# EAGLE board untitled (EAGLE 9.6.2), part 1 of 3
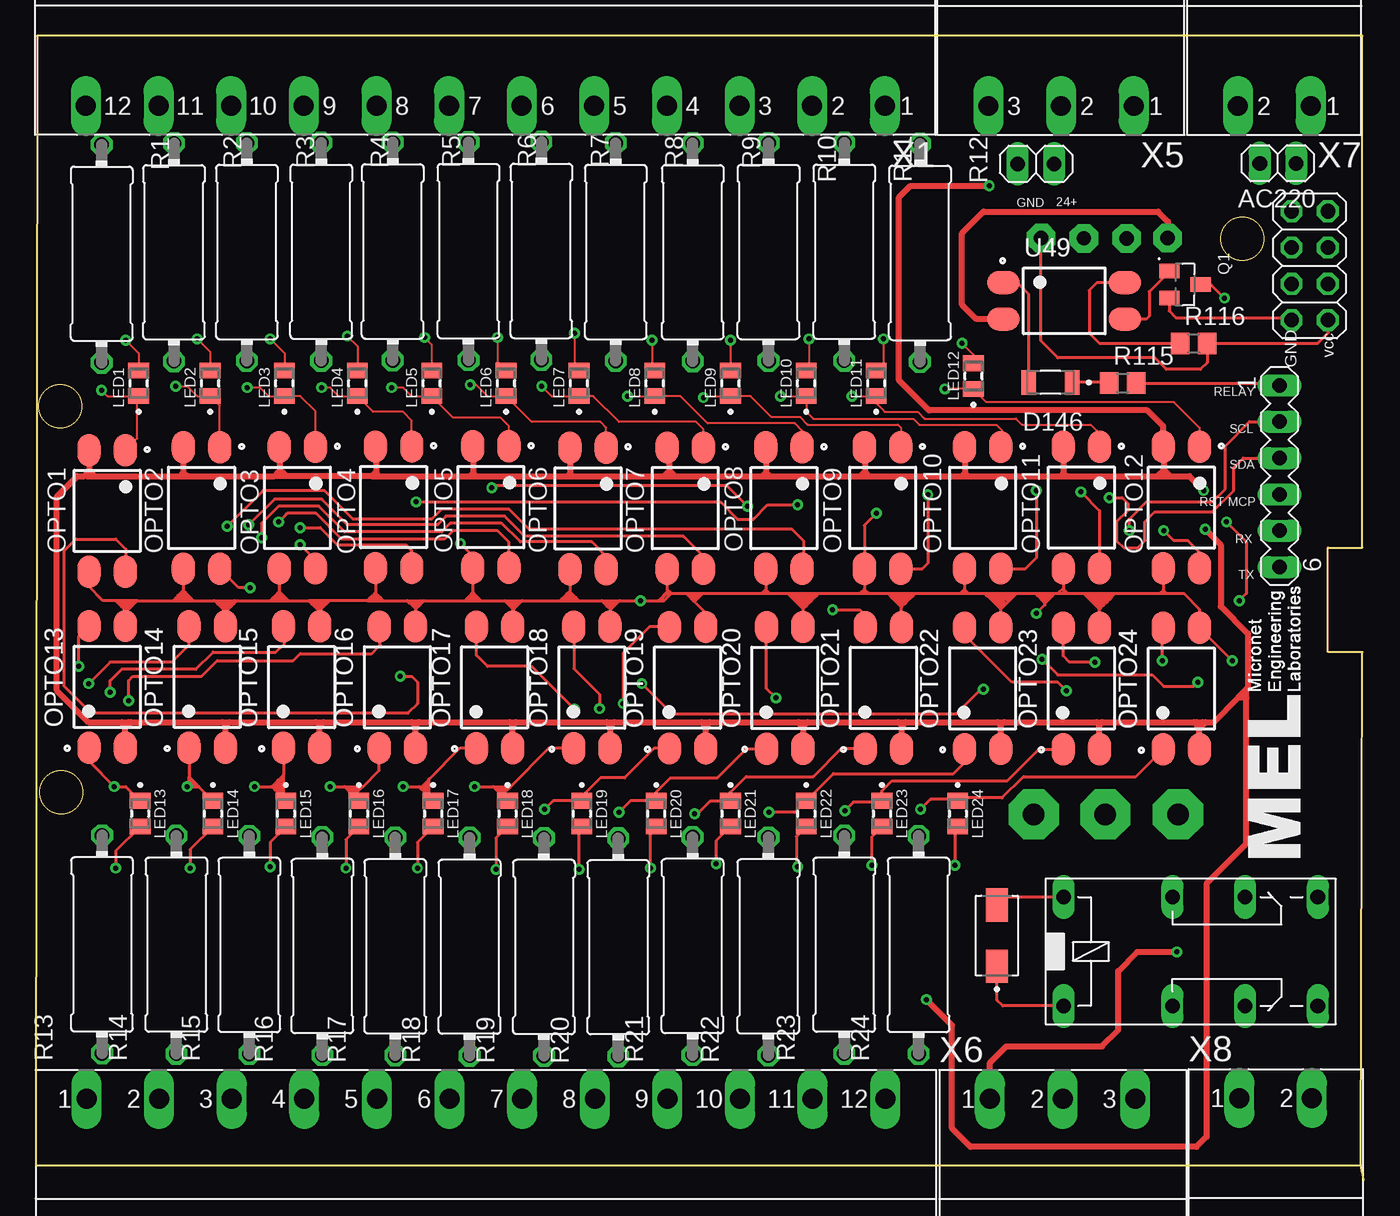
[diagram p0: board, top side]
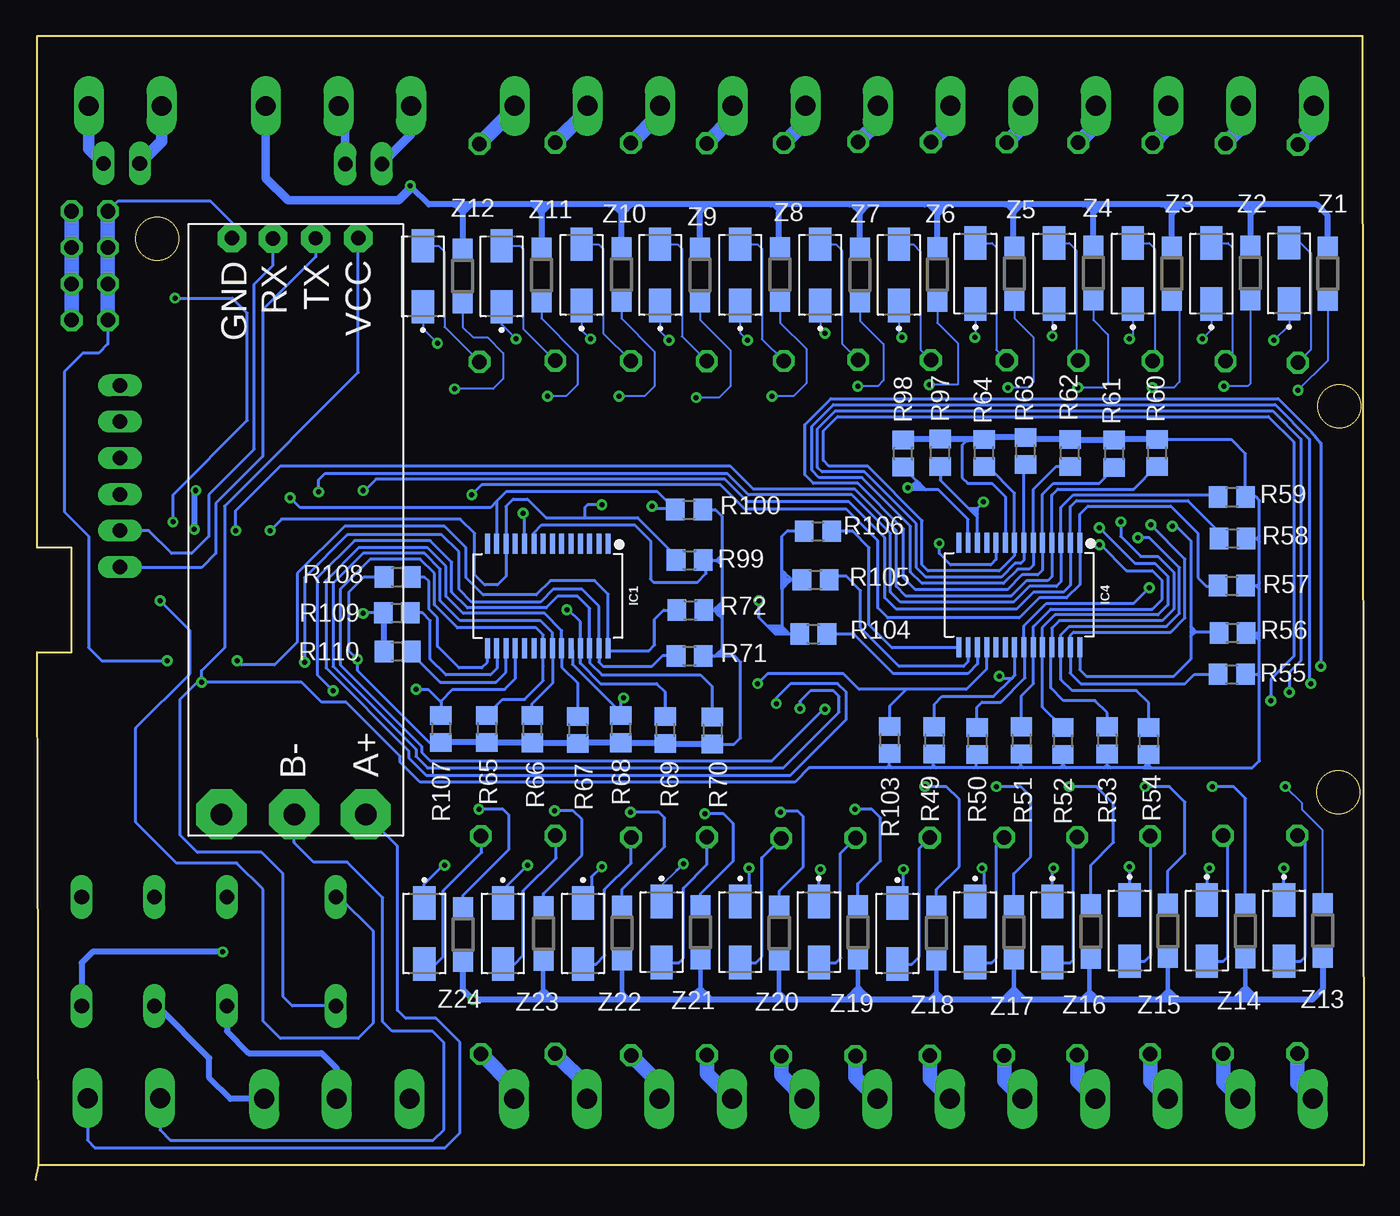
[diagram p1: board, bottom side, seen from below]

Size 92.9 x 80 mm. Coordinates in mm from the lower left corner, seen from the top.
Outline: 92.7,1 0,1 0.1,80 92.8,80 92.8,44.2 90.4,44.2 90.4,36.9 92.8,36.9 92.7,1
Outline: 92.9,0 92.7,1
Outline: circle at 84.4,65.8 radius 1.5
Outline: circle at 1.7,54.1 radius 1.5
Outline: circle at 1.8,27.1 radius 1.5
Copper layers (1*16): Top 0.035mm / dielectric 1.5mm / Bottom 0.035mm
Design rules "default": minimum track width 6mil, minimum drill 0.35mm, track to track 6mil, track to pad 6mil, pad to pad 6mil, via to via 6mil, smd to smd 6mil, copper to edge 40mil, drill to drill 6mil, minimum pad ring 10mil, minimum via ring 8mil, stop-mask expansion 4mil, vias tented up to drill 0mil, thermal gap 10mil
Net classes: 0 default: drill 0.3 mm, clearance 0.2 mm

## Footprints (pad centres in the part's own frame; a part is rotated, then mirrored left to right if it is on the bottom)
1X02 = drill 1.016 long: 1 -1.27,0; 2 1.27,0
DIOM5226X240N = smd 2.33 x 1.55: A 2.135,0; C -2.135,0
LEDC3216X120N = smd 1.01 x 1.73: + -1.51,0; - 1.51,0
SSOP28DB = smd 0.348 x 1.397: 1 -4.225,-3.656; 2 -3.575,-3.656; 3 -2.925,-3.656; 4 -2.275,-3.656; 5 -1.625,-3.656; 6 -0.975,-3.656; 7 -0.325,-3.656; 8 0.325,-3.656; 9 0.975,-3.656; 10 1.625,-3.656; 11 2.275,-3.656; 12 2.925,-3.656; 13 3.575,-3.656; 14 4.225,-3.656; 15 4.225,3.656; 16 3.575,3.656; 17 2.925,3.656; 18 2.275,3.656; 19 1.625,3.656; 20 0.975,3.656; 21 0.325,3.656; 22 -0.325,3.656; 23 -0.975,3.656; 24 -1.625,3.656; 25 -2.275,3.656; 26 -2.925,3.656; 27 -3.575,3.656; 28 -4.225,3.656
2X04 = drill 1.016 octagon: 1 -3.81,-1.27; 2 -3.81,1.27; 3 -1.27,-1.27; 4 -1.27,1.27; 5 1.27,-1.27; 6 1.27,1.27; 7 3.81,-1.27; 8 3.81,1.27
351 = drill 1.016 long: 1 -3.81,-3.81; 16 -3.81,3.81; O1 8.89,-3.81; O2 8.89,3.81; P1 3.81,-3.81; P2 3.81,3.81; S1 13.97,-3.81; S2 13.97,3.81
LEDC2012X120N = smd 1.1 x 1.45: A 0.9,0; C -0.9,0
SOT254P975X400-4N = smd 2.25 x 1.6: 1 -4.25,1.27; 2 -4.25,-1.27; 3 4.25,-1.27; 4 4.25,1.27
SOT95P240X120-3N = smd 1 x 1.4: 1 -0.95,-1.1; 2 0.95,-1.1; 3 0,1.1
0414/15 = drill 1.016 octagon: 1 -7.62,0; 2 7.62,0
R0805 = smd 1.3 x 1.5: 1 -0.95,0; 2 0.95,0
MA06-1 = drill 1.016 long: 1 -6.35,0; 2 -3.81,0; 3 -1.27,0; 4 1.27,0; 5 3.81,0; 6 6.35,0
TTL-RS485 = drill 1.5 pad 3.5 octagon: A -19.7,-6; B -19.7,-1; P$7 -19.7,4.1 | drill 1 pad 2 octagon: GND 20.6,3.37; RX 20.581,0.505; TX 20.583,-2.493; VCC 20.6,-5.47
MSTBA12 = drill 1.397 long: 1 -27.94,5.08; 2 -22.86,5.08; 3 -17.78,5.08; 4 -12.7,5.08; 5 -7.62,5.08; 6 -2.54,5.08; 7 2.54,5.08; 8 7.62,5.08; 9 12.7,5.08; 10 17.78,5.08; 11 22.86,5.08; 12 27.94,5.08
MSTBA3 = drill 1.397 long: 1 -5.08,5.08; 2 0,5.08; 3 5.08,5.08
MSTBA2 = drill 1.397 long: 1 -2.54,5.08; 2 2.54,5.08
SOD123 = smd 1.4 x 1.4: A 1.9,0; C -1.9,0

## Placement (x,y rotation side)
AC1  [1X02]  69.97,71.04 0 top
AC220  [1X02]  86.9,71.08 180 top
D1  US1M-13  [DIOM5226X240N]  67.24,17.07 90 top
D2  US1M-13  [DIOM5226X240N]  5.23,63.39 90 bottom
D3  US1M-13  [DIOM5226X240N]  10.66,63.37 90 bottom
D4  US1M-13  [DIOM5226X240N]  16.16,63.37 90 bottom
D5  US1M-13  [DIOM5226X240N]  21.66,63.37 90 bottom
D6  US1M-13  [DIOM5226X240N]  27.16,63.37 90 bottom
D7  US1M-13  [DIOM5226X240N]  32.52,63.28 90 bottom
D8  US1M-13  [DIOM5226X240N]  38.02,63.28 90 bottom
D9  US1M-13  [DIOM5226X240N]  43.62,63.28 90 bottom
D10  US1M-13  [DIOM5226X240N]  49.22,63.28 90 bottom
D11  US1M-13  [DIOM5226X240N]  54.72,63.28 90 bottom
D12  US1M-13  [DIOM5226X240N]  60.32,63.18 90 bottom
D13  US1M-13  [DIOM5226X240N]  65.82,63.18 90 bottom
D14  US1M-13  [DIOM5226X240N]  5.58,17.42 270 bottom
D15  US1M-13  [DIOM5226X240N]  10.98,17.42 270 bottom
D16  US1M-13  [DIOM5226X240N]  16.38,17.42 270 bottom
D17  US1M-13  [DIOM5226X240N]  21.78,17.32 270 bottom
D18  US1M-13  [DIOM5226X240N]  27.18,17.32 270 bottom
D19  US1M-13  [DIOM5226X240N]  32.62,17.22 270 bottom
D20  US1M-13  [DIOM5226X240N]  38.12,17.32 270 bottom
D21  US1M-13  [DIOM5226X240N]  43.62,17.32 270 bottom
D22  US1M-13  [DIOM5226X240N]  49.12,17.32 270 bottom
D23  US1M-13  [DIOM5226X240N]  54.62,17.22 270 bottom
D24  US1M-13  [DIOM5226X240N]  60.22,17.22 270 bottom
D25  US1M-13  [DIOM5226X240N]  65.72,17.22 270 bottom
D146  LHN974_RED_LED_1206  [LEDC3216X120N]  70.98,55.76 180 top
IC1  MCP23017SS  [SSOP28DB]  57.08,40.82 180 bottom
IC4  MCP23017SS  [SSOP28DB]  24.1,40.9 180 bottom
JP2  [2X04]  89.12,63.92 90 top
K2  351  [351]  75.71,15.96 0 top
LED1  SML-LXT0805IW-TR  [LEDC2012X120N]  7.2,55.7 90 top
LED2  SML-LXT0805IW-TR  [LEDC2012X120N]  12.2,55.7 90 top
LED3  SML-LXT0805IW-TR  [LEDC2012X120N]  17.4,55.7 90 top
LED4  SML-LXT0805IW-TR  [LEDC2012X120N]  22.5,55.7 90 top
LED5  SML-LXT0805IW-TR  [LEDC2012X120N]  27.7,55.7 90 top
LED6  SML-LXT0805IW-TR  [LEDC2012X120N]  32.9,55.7 90 top
LED7  SML-LXT0805IW-TR  [LEDC2012X120N]  38,55.7 90 top
LED8  SML-LXT0805IW-TR  [LEDC2012X120N]  43.3,55.7 90 top
LED9  SML-LXT0805IW-TR  [LEDC2012X120N]  48.6,55.7 90 top
LED10  SML-LXT0805IW-TR  [LEDC2012X120N]  53.9,55.7 90 top
LED11  SML-LXT0805IW-TR  [LEDC2012X120N]  58.8,55.7 90 top
LED12  SML-LXT0805IW-TR  [LEDC2012X120N]  65.6,56.2 90 top
LED13  SML-LXT0805IW-TR  [LEDC2012X120N]  7.3,25.6 270 top
LED14  SML-LXT0805IW-TR  [LEDC2012X120N]  12.4,25.6 270 top
LED15  SML-LXT0805IW-TR  [LEDC2012X120N]  17.5,25.6 270 top
LED16  SML-LXT0805IW-TR  [LEDC2012X120N]  22.6,25.6 270 top
LED17  SML-LXT0805IW-TR  [LEDC2012X120N]  27.8,25.6 270 top
LED18  SML-LXT0805IW-TR  [LEDC2012X120N]  33,25.6 270 top
LED19  SML-LXT0805IW-TR  [LEDC2012X120N]  38.2,25.6 270 top
LED20  SML-LXT0805IW-TR  [LEDC2012X120N]  43.4,25.6 270 top
LED21  SML-LXT0805IW-TR  [LEDC2012X120N]  48.6,25.6 270 top
LED22  SML-LXT0805IW-TR  [LEDC2012X120N]  53.9,25.6 270 top
LED23  SML-LXT0805IW-TR  [LEDC2012X120N]  59.2,25.6 270 top
LED24  SML-LXT0805IW-TR  [LEDC2012X120N]  64.5,25.6 270 top
OPTO1  PC817X2NIP0F  [SOT254P975X400-4N]  5,46.77 270 top
OPTO2  PC817X2NIP0F  [SOT254P975X400-4N]  11.6,46.98 270 top
OPTO3  PC817X2NIP0F  [SOT254P975X400-4N]  18.3,46.99 270 top
OPTO4  PC817X2NIP0F  [SOT254P975X400-4N]  25.04,47.03 270 top
OPTO5  PC817X2NIP0F  [SOT254P975X400-4N]  31.84,47.04 270 top
OPTO6  PC817X2NIP0F  [SOT254P975X400-4N]  38.64,46.95 270 top
OPTO7  PC817X2NIP0F  [SOT254P975X400-4N]  45.44,46.96 270 top
OPTO8  PC817X2NIP0F  [SOT254P975X400-4N]  52.34,46.97 270 top
OPTO9  PC817X2NIP0F  [SOT254P975X400-4N]  59.24,46.98 270 top
OPTO10  PC817X2NIP0F  [SOT254P975X400-4N]  66.24,46.99 270 top
OPTO11  PC817X2NIP0F  [SOT254P975X400-4N]  73.14,47 270 top
OPTO12  PC817X2NIP0F  [SOT254P975X400-4N]  80.14,47.01 270 top
OPTO13  PC817X2NIP0F  [SOT254P975X400-4N]  5,34.47 90 top
OPTO14  PC817X2NIP0F  [SOT254P975X400-4N]  12,34.46 90 top
OPTO15  PC817X2NIP0F  [SOT254P975X400-4N]  18.6,34.45 90 top
OPTO16  PC817X2NIP0F  [SOT254P975X400-4N]  25.3,34.44 90 top
OPTO17  PC817X2NIP0F  [SOT254P975X400-4N]  32.1,34.43 90 top
OPTO18  PC817X2NIP0F  [SOT254P975X400-4N]  38.9,34.42 90 top
OPTO19  PC817X2NIP0F  [SOT254P975X400-4N]  45.6,34.41 90 top
OPTO20  PC817X2NIP0F  [SOT254P975X400-4N]  52.4,34.4 90 top
OPTO21  PC817X2NIP0F  [SOT254P975X400-4N]  59.3,34.39 90 top
OPTO22  PC817X2NIP0F  [SOT254P975X400-4N]  66.24,34.37 90 top
OPTO23  PC817X2NIP0F  [SOT254P975X400-4N]  73.14,34.36 90 top
OPTO24  PC817X2NIP0F  [SOT254P975X400-4N]  80.14,34.35 90 top
Q1  S9013  [SOT95P240X120-3N]  80.38,62.6 270 top
R1  [0414/15]  4.61,64.76 270 top
R2  [0414/15]  9.67,64.86 270 top
R3  [0414/15]  14.77,64.88 270 top
R4  [0414/15]  19.97,64.9 270 top
R5  [0414/15]  24.97,64.92 270 top
R6  [0414/15]  30.27,64.94 270 top
R7  [0414/15]  35.37,64.96 270 top
R8  [0414/15]  40.57,64.88 270 top
R9  [0414/15]  45.96,64.86 270 top
R10  [0414/15]  51.26,64.88 270 top
R11  [0414/15]  56.56,64.9 270 top
R12  [0414/15]  61.86,64.82 270 top
R13  [0414/15]  4.64,16.46 90 top
R14  [0414/15]  9.84,16.44 90 top
R15  [0414/15]  14.94,16.42 90 top
R16  [0414/15]  20.05,16.34 90 top
R17  [0414/15]  25.15,16.32 90 top
R18  [0414/15]  30.35,16.3 90 top
R19  [0414/15]  35.55,16.28 90 top
R20  [0414/15]  40.75,16.26 90 top
R21  [0414/15]  45.95,16.34 90 top
R22  [0414/15]  51.25,16.32 90 top
R23  [0414/15]  56.56,16.44 90 top
R24  [0414/15]  61.76,16.42 90 top
R49  [R0805]  30.05,30.73 270 bottom
R50  [R0805]  27.05,30.68 270 bottom
R51  [R0805]  23.95,30.73 270 bottom
R52  [R0805]  21.05,30.68 270 bottom
R53  [R0805]  17.95,30.73 270 bottom
R54  [R0805]  15.05,30.68 270 bottom
R55  [R0805]  9.23,35.35 0 bottom
R56  [R0805]  9.18,38.25 0 bottom
R57  [R0805]  9.23,41.55 0 bottom
R58  [R0805]  9.18,44.85 0 bottom
R59  [R0805]  9.23,47.75 0 bottom
R60  [R0805]  14.45,50.82 90 bottom
R61  [R0805]  17.45,50.77 90 bottom
R62  [R0805]  20.55,50.82 90 bottom
R63  [R0805]  23.65,50.97 90 bottom
R64  [R0805]  26.55,50.82 90 bottom
R65  [R0805]  61.35,31.53 270 bottom
R66  [R0805]  58.17,31.51 270 bottom
R67  [R0805]  54.97,31.46 270 bottom
R68  [R0805]  51.97,31.51 270 bottom
R69  [R0805]  48.87,31.46 270 bottom
R70  [R0805]  45.57,31.41 270 bottom
R71  [R0805]  47.16,36.63 0 bottom
R72  [R0805]  47.11,39.83 0 bottom
R97  [R0805]  29.63,50.84 90 bottom
R98  [R0805]  32.23,50.79 90 bottom
R99  [R0805]  47.16,43.33 0 bottom
R100  [R0805]  47.2,46.86 0 bottom
R103  [R0805]  33.16,30.75 90 bottom
R104  [R0805]  38.5,38.16 0 bottom
R105  [R0805]  38.35,41.96 0 bottom
R106  [R0805]  38.18,45.35 0 bottom
R107  [R0805]  64.55,31.53 270 bottom
R108  [R0805]  67.58,42.15 0 bottom
R109  [R0805]  67.63,39.65 0 bottom
R110  [R0805]  67.58,36.95 0 bottom
R115  [R0805]  76.02,55.72 0 top
R116  [R0805]  80.99,58.49 0 top
SV2  [MA06-1]  87,49.2 270 top
TTL-RS1  [TTL-RS485]  75.81,45.25 90 bottom
U49  PC817X2NIP0F  [SOT254P975X400-4N]  71.94,61.46 0 top
X1  MSTBA12  [MSTBA12]  31.45,80.18 180 top
X2  MSTBA12  [MSTBA12]  31.49,0.58 0 top
X5  MSTBA3  [MSTBA3]  71.72,80.17 180 top
X6  MSTBA3  [MSTBA3]  71.84,0.58 0 top
X7  MSTBA2  [MSTBA2]  86.64,80.17 180 top
X8  MSTBA2  [MSTBA2]  86.73,0.63 0 top
Z1  [SOD123]  2.53,63.36 90 bottom
Z2  [SOD123]  7.93,63.41 90 bottom
Z3  [SOD123]  13.43,63.36 90 bottom
Z4  [SOD123]  18.93,63.41 90 bottom
Z5  [SOD123]  24.43,63.36 90 bottom
Z6  [SOD123]  29.83,63.31 90 bottom
Z7  [SOD123]  35.23,63.26 90 bottom
Z8  [SOD123]  40.83,63.31 90 bottom
Z9  [SOD123]  46.43,63.26 90 bottom
Z10  [SOD123]  51.93,63.31 90 bottom
Z11  [SOD123]  57.53,63.26 90 bottom
Z12  [SOD123]  63.03,63.21 90 bottom
Z13  [SOD123]  2.87,17.44 270 bottom
Z14  [SOD123]  8.27,17.39 270 bottom
Z15  [SOD123]  13.69,17.41 270 bottom
Z16  [SOD123]  19.09,17.36 270 bottom
Z17  [SOD123]  24.49,17.31 270 bottom
Z18  [SOD123]  29.89,17.26 270 bottom
Z19  [SOD123]  35.39,17.31 270 bottom
Z20  [SOD123]  40.89,17.26 270 bottom
Z21  [SOD123]  46.39,17.31 270 bottom
Z22  [SOD123]  51.89,17.26 270 bottom
Z23  [SOD123]  57.39,17.21 270 bottom
Z24  [SOD123]  62.99,17.16 270 bottom

## Library data of the parts
AC1 AC220 JP2 = pinhead
D1-D25 = US1M-13; AVAILABILITY: In Stock; DESCRIPTION: Diode Standard 1000 V 1A Surface Mount SMA; MF: Diodes Incorporated; MP: US1M-13; PACKAGE: DO-214AC-214 Diodes Incorporated; PRICE: None; PURCHASE-URL: https://pricing.snapeda.com/search/part/US1M-13/?ref=eda
D146 = LHN974_RED_LED_1206; AVAILABILITY: Not in stock; DESCRIPTION: 2.6 V Red LED SMD; MF: Osram; MP: LHN974 RED LED 1206; PACKAGE: None; PRICE: None
IC1 IC4 = adafruit_edited
K2 = relay; OC_FARNELL: unknown; OC_NEWARK: unknown
LED1-LED24 = SML-LXT0805IW-TR; AVAILABILITY: In Stock; DESCRIPTION: Red - LED Indication - Discrete 2V 0805 (2012 Metric); MF: Lumex Opto/Components; MP: SML-LXT0805IW-TR; PACKAGE: 0805 Lumex; PRICE: None; PURCHASE-URL: https://pricing.snapeda.com/search/part/SML-LXT0805IW-TR/?ref=eda
OPTO1-OPTO24 U49 = PC817X2NIP0F; AVAILABILITY: Not in stock; DESCRIPTION: Optoisolator Transistor Output 5000Vrms 1 Channel 4-SMD; MF: Sharp Microelectronics; MP: PC817X2NIP0F; PACKAGE: SMD-4 Sharp Microelectronics; PRICE: None
Q1 = S9013; AVAILABILITY: Not in stock; DESCRIPTION: Bipolar (BJT) Transistor NPN 20V 500mA 625mW Through Hole TO-92-3; MF: JCET; MP: S9013; PACKAGE: SOT-23-3 JCET; PRICE: None
R1-R24 R49-R72 R97-R100 R103-R110 R115 R116 = rcl; SPICEPREFIX: R
SV2 = con-lstb; OC_FARNELL: unknown; OC_NEWARK: unknown
TTL-RS1 = TTL-RS485
X1 X2 = con-phoenix-508; MPN: 1757349; OC_FARNELL: 3705250; OC_NEWARK: 71C4169
X5 X6 = con-phoenix-508; MF: FARNELL; MPN: 1757255; OC_FARNELL: 3705183; OC_NEWARK: 71C4162
X7 X8 = con-phoenix-508; MF: FARNELL; MPN: 1757242; OC_FARNELL: 3705171; OC_NEWARK: 71C4161
Z1-Z24 = diode

## Nets
24V+: AC1.2 X5.2
24V-: AC1.1 X5.3
+: AC220.1 X7.1
-: AC220.2 X7.2
A+: TTL-RS1.A X8.2
B-: TTL-RS1.B X8.1
COMM: OPTO1.2 OPTO2.2 OPTO3.2 OPTO4.2 OPTO5.2 OPTO6.2 OPTO7.2 OPTO8.2 OPTO9.2 OPTO10.2 OPTO11.2 OPTO12.2 OPTO13.2 OPTO14.2 OPTO15.2 OPTO16.2 OPTO17.2 OPTO18.2 OPTO19.2 OPTO20.2 OPTO21.2 OPTO22.2 OPTO23.2 OPTO24.2 X5.1 Z1.A Z2.A Z3.A Z4.A Z5.A Z6.A Z7.A Z8.A Z9.A Z10.A Z11.A Z12.A Z13.A Z14.A Z15.A Z16.A Z17.A Z18.A Z19.A Z20.A Z21.A Z22.A Z23.A Z24.A
COMMON: K2.P1 X6.2
GND: IC1.10 IC4.10 JP2.2 JP2.4 JP2.6 JP2.8 OPTO1.3 OPTO2.3 OPTO3.3 OPTO4.3 OPTO5.3 OPTO6.3 OPTO7.3 OPTO8.3 OPTO9.3 OPTO10.3 OPTO11.3 OPTO12.3 OPTO13.3 OPTO14.3 OPTO15.3 OPTO16.3 OPTO17.3 OPTO18.3 OPTO19.3 OPTO20.3 OPTO21.3 OPTO22.3 OPTO23.3 OPTO24.3 Q1.2 R104.1 R105.1 R106.1 R109.1 R110.1 TTL-RS1.GND U49.2
N$1: D2.A R1.2
N$2: LED10.C OPTO10.1 Z10.C
N$3: D3.A R2.2
N$5: D4.A R3.2
N$6: LED1.C OPTO1.1 Z1.C
N$7: D5.A R4.2
N$8: D2.C LED1.A
N$9: D6.A R5.2
N$10: D3.C LED2.A
N$11: D7.A R6.2
N$12: LED2.C OPTO2.1 Z2.C
N$13: D8.A R7.2
N$14: D4.C LED3.A
N$15: D9.A R8.2
N$16: LED3.C OPTO3.1 Z3.C
N$17: D15.A R14.2
N$18: D5.C LED4.A
N$19: LED4.C OPTO4.1 Z4.C
N$20: D10.A R9.2
N$21: D6.C LED5.A
N$22: LED5.C OPTO5.1 Z5.C
N$23: D7.C LED6.A
N$24: D11.A R10.2
N$25: D8.C LED7.A
N$26: LED6.C OPTO6.1 Z6.C
N$28: D12.A R11.2
N$36: D13.A R12.2
N$40: D14.A R13.2
N$44: D16.A R15.2
N$48: D17.A R16.2
N$49: D9.C LED8.A
N$50: D10.C LED9.A
N$51: D11.C LED10.A
N$52: D18.A R17.2
N$53: D12.C LED11.A
N$54: D13.C LED12.A
N$55: D14.C LED13.A
N$56: D19.A R18.2
N$57: D15.C LED14.A
N$58: D16.C LED15.A
N$59: D17.C LED16.A
N$60: D20.A R19.2
N$61: D18.C LED17.A
N$62: D19.C LED18.A
N$63: D20.C LED19.A
N$64: D21.C LED20.A
N$65: D22.C LED21.A
N$66: D21.A R20.2
N$67: D23.C LED22.A
N$68: D24.C LED23.A
N$69: D25.C LED24.A
N$70: LED7.C OPTO7.1 Z7.C
N$71: D22.A R21.2
N$72: LED8.C OPTO8.1 Z8.C
N$73: LED9.C OPTO9.1 Z9.C
N$74: LED11.C OPTO11.1 Z11.C
N$75: LED12.C OPTO12.1 Z12.C
N$76: D23.A R22.2
N$77: LED13.C OPTO13.1 Z13.C
N$78: LED14.C OPTO14.1 Z14.C
N$79: LED15.C OPTO15.1 Z15.C
N$80: D24.A R23.2
N$81: LED16.C OPTO16.1 Z16.C
N$82: LED17.C OPTO17.1 Z17.C
N$83: LED18.C OPTO18.1 Z18.C
N$84: D25.A R24.2
N$85: LED19.C OPTO19.1 Z19.C
N$86: LED20.C OPTO20.1 Z20.C
N$87: LED21.C OPTO21.1 Z21.C
N$88: LED22.C OPTO22.1 Z22.C
N$89: LED23.C OPTO23.1 Z23.C
N$90: LED24.C OPTO24.1 Z24.C
N$97: D146.- U49.1
N$98: D146.+ R115.1
N$99: R116.1 U49.4
N$101: D1.A K2.16 Q1.3
N$102: Q1.1 U49.3
N$107: IC1.15 R108.2
N$108: IC1.16 R109.2
N$109: IC4.15 R106.2
N$110: IC4.16 R105.2
N$111: IC4.17 R104.2
N$113: IC1.17 R110.2
N$135: IC1.20
N$136: IC1.19
NC: K2.O1 X6.3
NO: K2.S1 X6.1
OUT1: IC4.21 OPTO1.4 R49.1
OUT2: IC4.22 OPTO2.4 R50.1
OUT3: IC4.23 OPTO3.4 R51.1
OUT4: IC4.24 OPTO4.4 R52.1
OUT5: IC4.25 OPTO5.4 R53.1
OUT6: IC4.26 OPTO6.4 R54.1
OUT7: IC4.27 OPTO7.4 R55.1
OUT8: IC4.28 OPTO8.4 R56.1
OUT9: IC4.1 OPTO9.4 R57.1
OUT10: IC4.2 OPTO10.4 R58.1
OUT11: IC4.3 OPTO11.4 R59.1
OUT12: IC4.4 OPTO12.4 R60.1
OUT13: IC4.5 OPTO13.4 R61.1
OUT14: IC4.6 OPTO14.4 R62.1
OUT15: IC4.7 OPTO15.4 R63.1
OUT16: IC4.8 OPTO16.4 R64.1
OUT17: IC1.21 OPTO17.4 R65.1
OUT18: IC1.22 OPTO18.4 R66.1
OUT19: IC1.23 OPTO19.4 R67.1
OUT20: IC1.24 OPTO20.4 R68.1
OUT21: IC1.25 OPTO21.4 R69.1
OUT22: IC1.26 OPTO22.4 R70.1
OUT23: IC1.27 OPTO23.4 R71.1
OUT24: IC1.28 OPTO24.4 R72.1
P1: R1.1 X1.12
P2: R2.1 X1.11
P3: R3.1 X1.10
P4: R4.1 X1.9
P5: R5.1 X1.8
P6: R6.1 X1.7
P7: R7.1 X1.6
P8: R8.1 X1.5
P9: R9.1 X1.4
P10: R10.1 X1.3
P11: R11.1 X1.2
P12: R12.1 X1.1
P13: R13.1 X2.1
P14: R14.1 X2.2
P15: R15.1 X2.3
P16: R16.1 X2.4
P17: R17.1 X2.5
P18: R18.1 X2.6
P19: R19.1 X2.7
P20: R20.1 X2.8
P21: R21.1 X2.9
P22: R22.1 X2.10
P23: R23.1 X2.11
P24: R24.1 X2.12
RELAY: R115.2 SV2.1
RESET: IC1.18 IC4.18 R103.2 R107.1
RESET1: SV2.4
RX: SV2.5 TTL-RS1.RX
SCL: IC1.12 IC4.12 R97.1 R99.1 SV2.2
SDA: IC1.13 IC4.13 R98.1 R100.1 SV2.3
TX: SV2.6 TTL-RS1.TX
VCC: D1.C IC1.9 IC4.9 JP2.1 JP2.3 JP2.5 JP2.7 K2.1 R49.2 R50.2 R51.2 R52.2 R53.2 R54.2 R55.2 R56.2 R57.2 R58.2 R59.2 R60.2 R61.2 R62.2 R63.2 R64.2 R65.2 R66.2 R67.2 R68.2 R69.2 R70.2 R71.2 R72.2 R97.2 R98.2 R99.2 R100.2 R103.1 R107.2 R108.1 R116.2 TTL-RS1.VCC